# Altium PCB PTX90415AG.PcbDoc
Units mm, origin at the board's own origin, x right, y up, seen from the top; angles counter-clockwise.
Board outline 1054.6 x 677.8 mm, 2 copper layers (Top Layer, Bottom Layer); 110 components, 83 nets, 448 pads, 0 vias.
Unrouted connection lines stored in the file: 284.
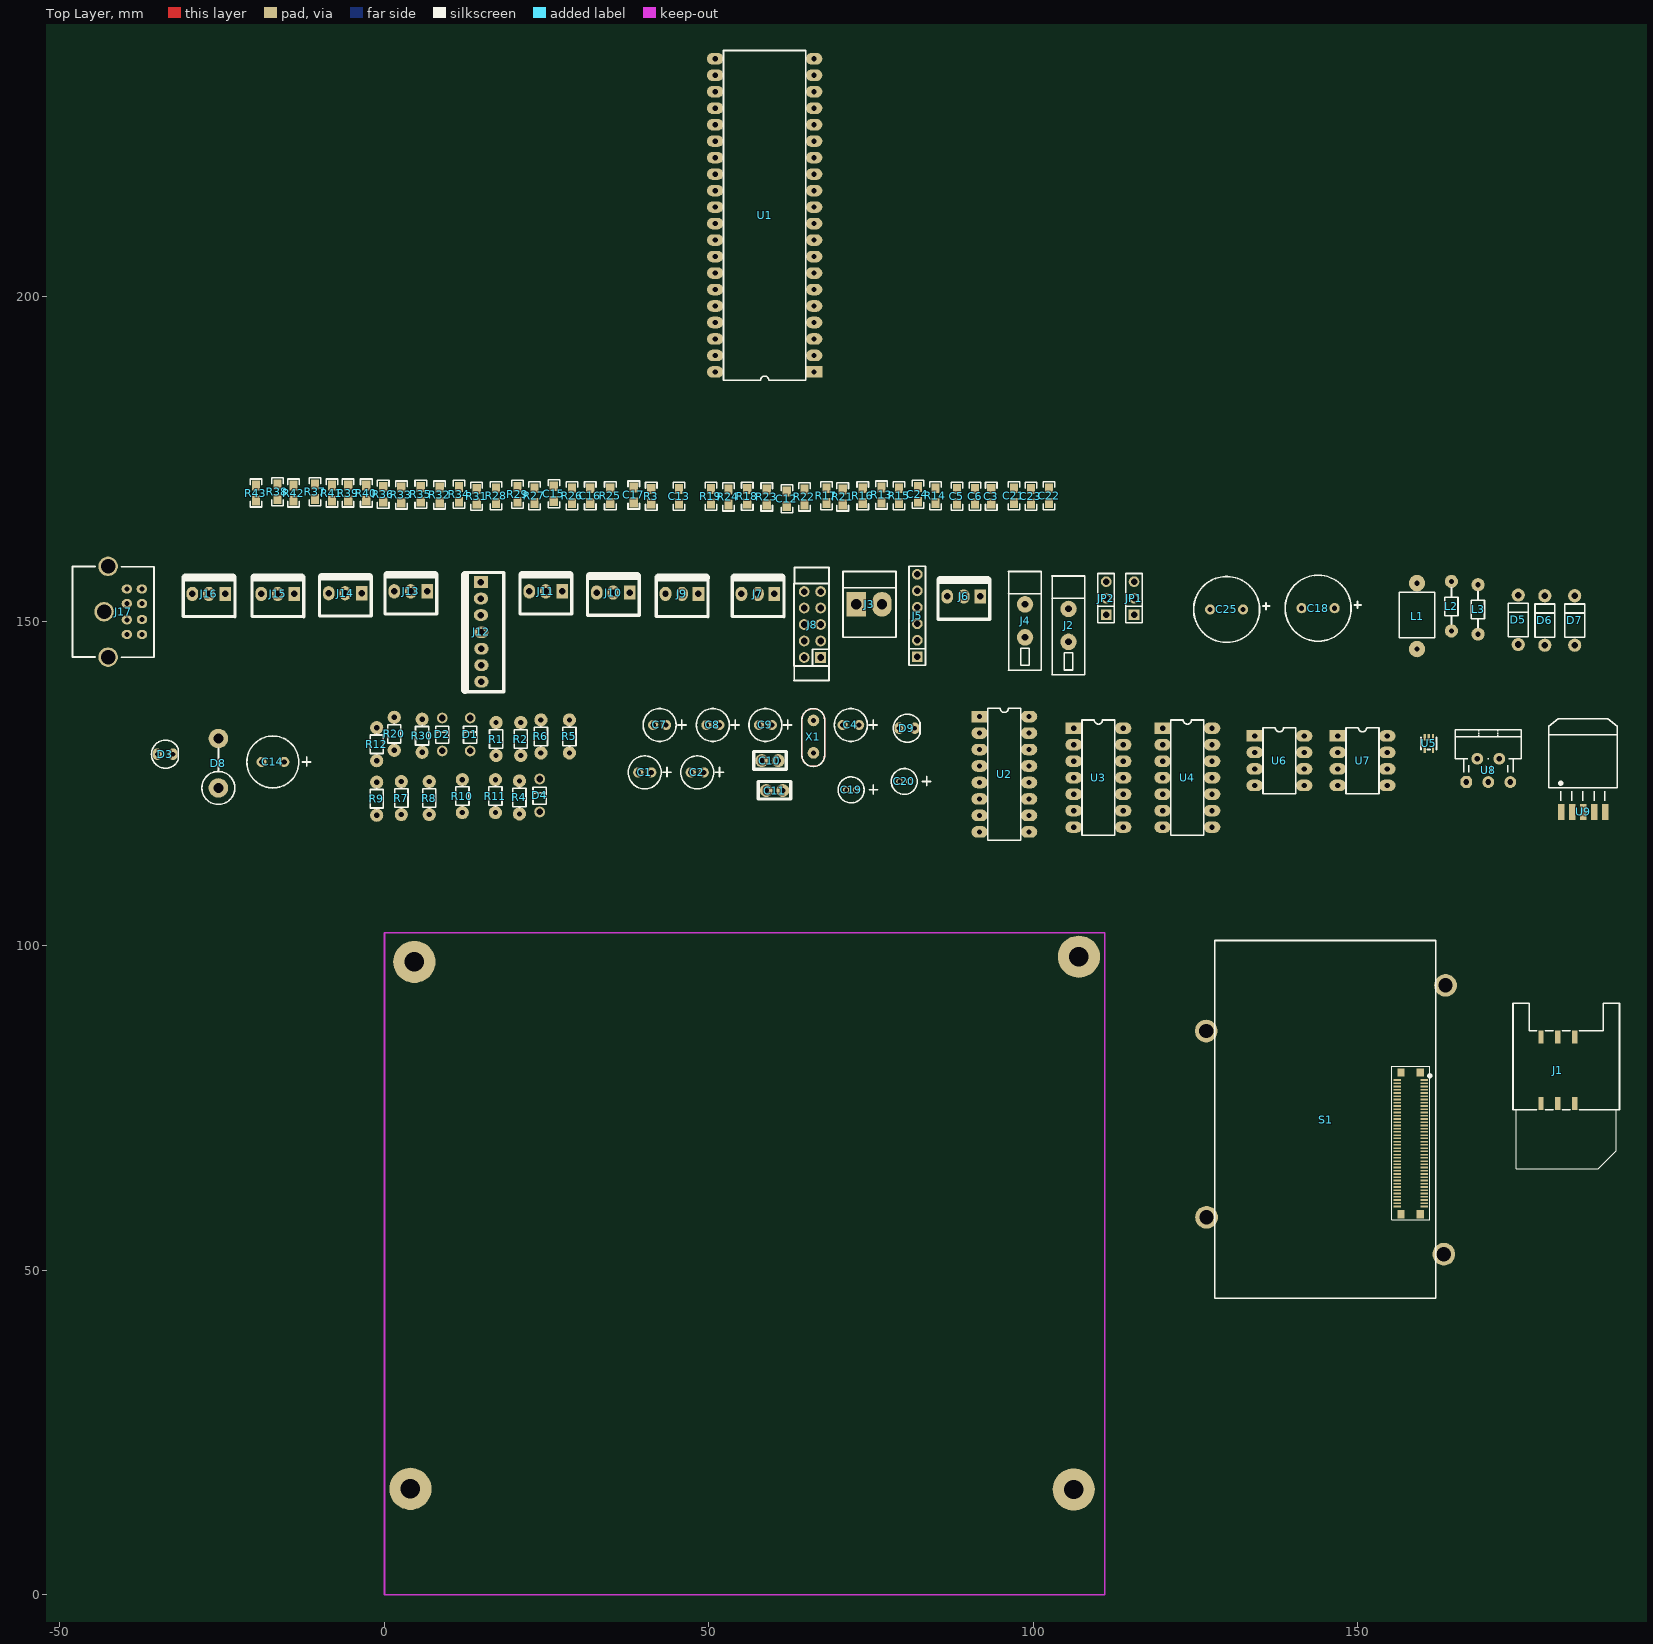
[diagram p0: Top Layer view]
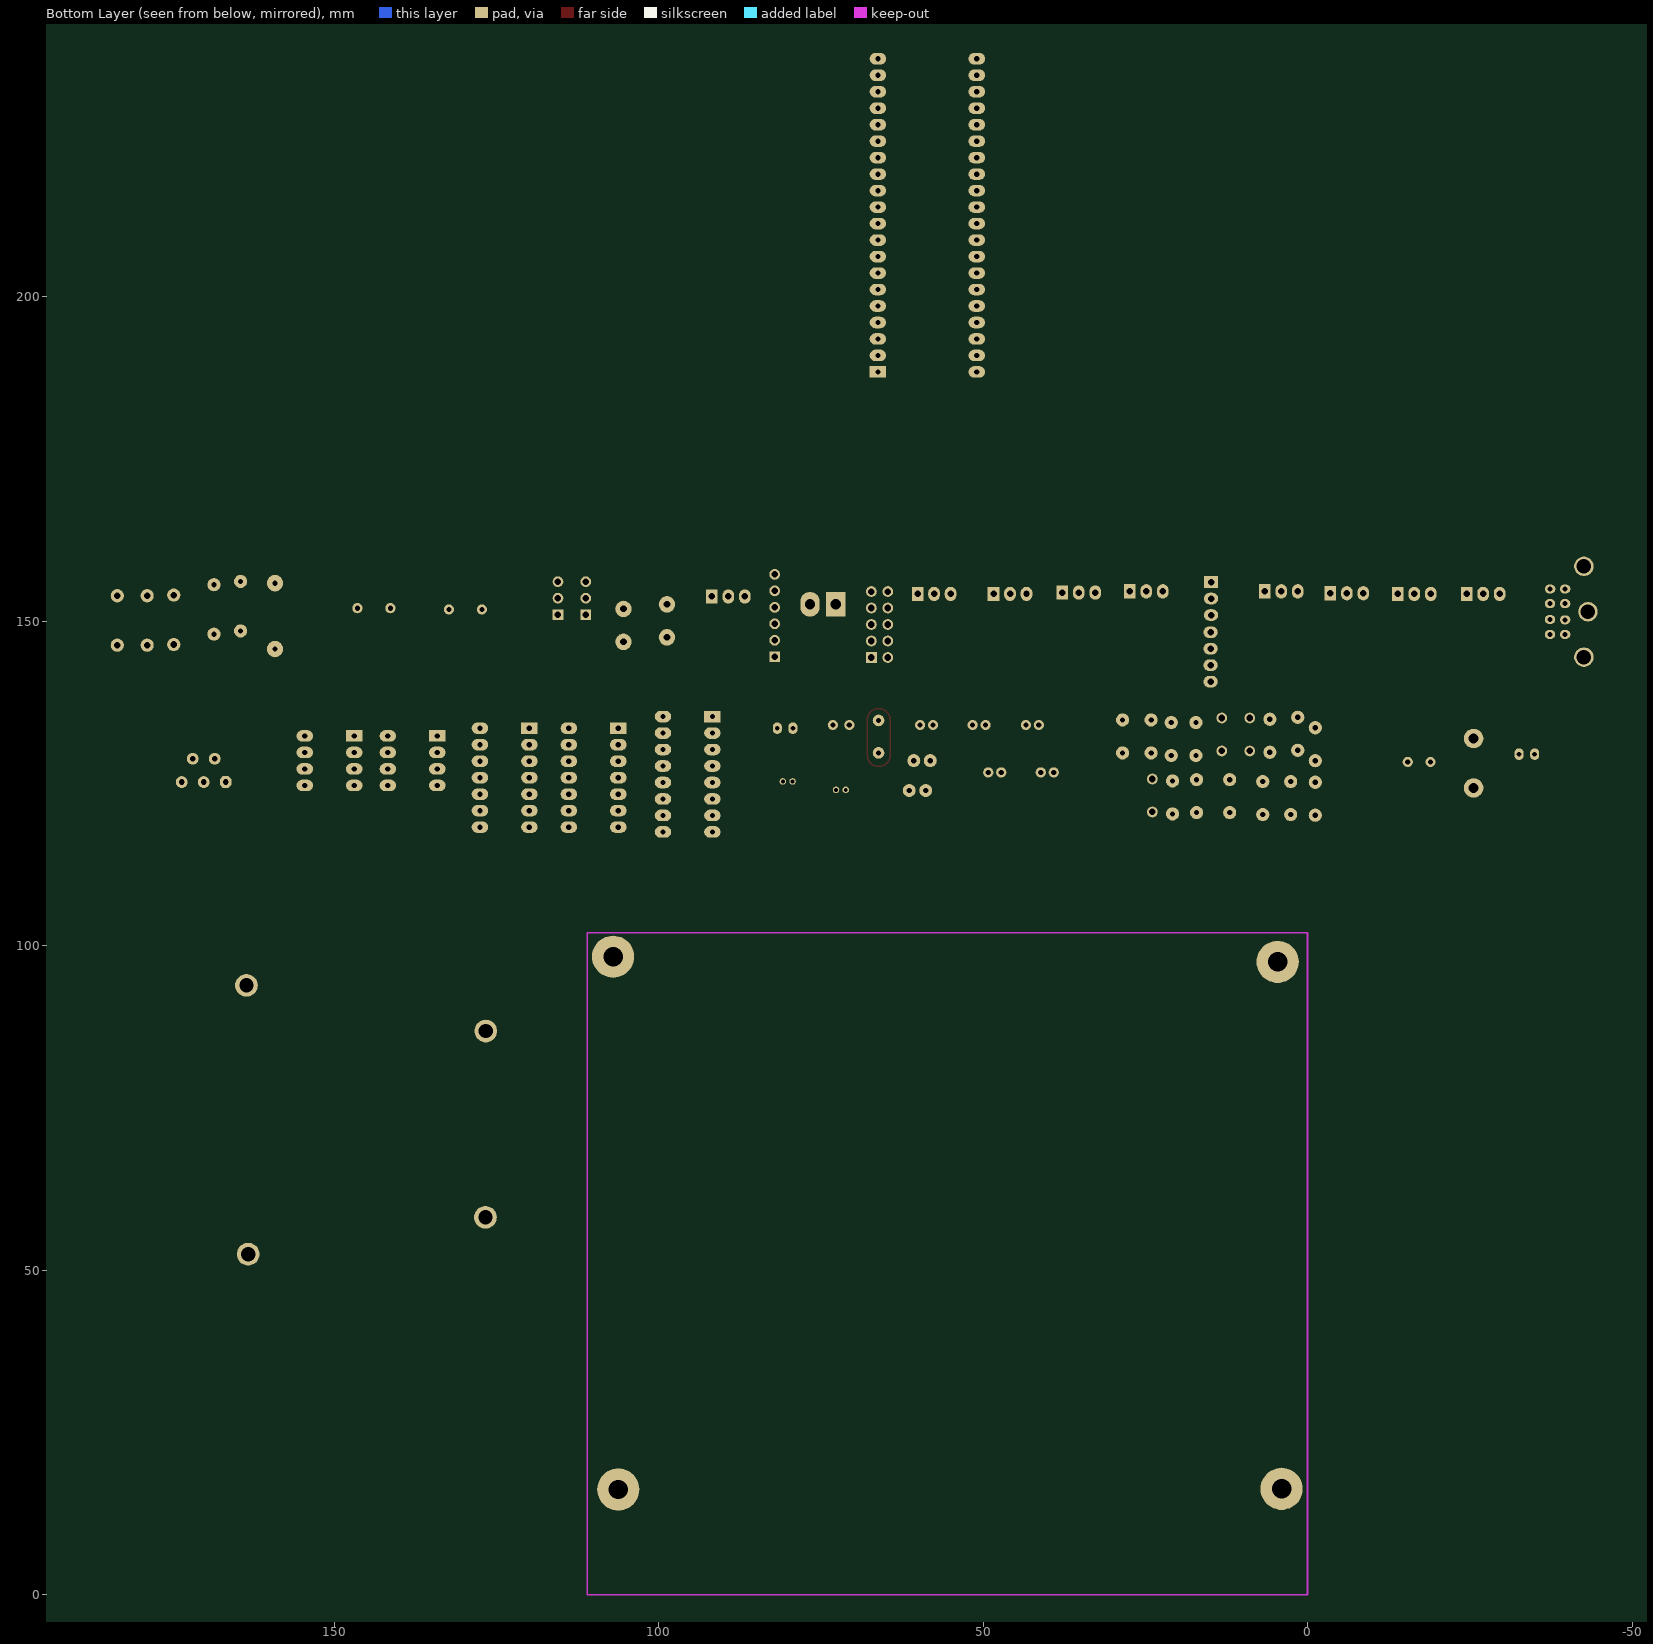
[diagram p1: Bottom Layer view, seen from below]

## Layer stack, top to bottom
Top Layer: signal copper 0.0356
Dielectric: dielectric 0.32, FR-4, Dk 4.8
Bottom Layer: signal copper 0.0356

## Board outline
-471,-338.1 -471,339.7 583.6,339.7 583.6,-338.1

## Design rules (kind name [scope] priority, off if disabled: settings)
Clearance VIAS [InNet('GND') vs (IsVia)] p1: gap=0.5
Clearance pilares [InNet('GND') vs (HasFootprint('TORNILLO 4-40'))] p2: gap=0
Clearance "Keep Out" [All vs OnLayer('Keep-Out Layer')] p3: gap=0.1
Clearance GNd [InNet('GND') vs InNet('GND')] p4: gap=0.3
Clearance [All] p5: gap=1
ComponentClearance [All] p1: gap=0.254 collisioncheckmode=3 verticalgap=0.254
PolygonConnect [All] p1: connectstyle=Relief reliefconductorwidth=0.5 reliefentries=4 polygonreliefangle="90 Angle"
RoutingVias [All] p1: holewidth=0.711 width=1.27 viastyle="Through Hole" minholewidth=0.711 minwidth=1.27 maxholewidth=0.711 maxwidth=1.27
SolderMaskExpansion [All] p1: expansion=0.102
TestPointUsage [All] p1: valid=0 allowmultiple=FALSE
Testpoint [All] p1: side=15 testpointundercomponent=TRUE minsize=1.016 maxsize=2.54 preferedsize=1.524 minholesize=0 maxholesize=1.016 preferedholesize=0.813 testpointgrid=0.025 style=1023 order=0123456789
Width [All] p1: maxlimit=2 minlimit=0.01 preferedwidth=0.2 toplayer_prefwidth=0.6 bottomlayer_prefwidth=0.5 minimp=50.000000 maximp=50.000000 favimp=50.000000
17 further rules are at their usual default settings.

## Classes and differential pairs
component class SEP00949BG: C18 C19 C20 C21 C22 C23 C24 C25 D5 D6 D7 D8 J2 J3 J4 J5 J6 J7 J8 J9 J10 J11 J12 J13 J14 J15 J16 J17 L1 L2 L3 R7 R8 R9 R10 R11 R12 R13 R14 R15 R16 R17 R18 R19 R20 R21 R22 R23 R24 R25 R26 R27 R28 R29 R30 R31 R32 R33 R34 R35 R36 R37 R38 R39 R40 R41 R42 R43 U8 U9
component class SEP00949AG: C1 C2 C3 C4 C5 C6 C7 C8 C9 C10 C11 C12 C13 C14 C15 C16 C17 D1 D2 D3 D4 J1 JP1 JP2 R1 R2 R3 R4 R5 R6 S1 U1 U2 U3 U4 U5 U6 U7 X1

## Components (designator, comment, footprint, x,y, rotation, side; value= is the part's Value field where it differs from the comment)
C1 "10uF25V" "CE 2.0/5.0" 40.098,126.699 r0 top
C2 "10uF25V" "CE 2.0/5.0" 48.198,126.699 r0 top
C3 "100nF" 0805 93.498,168.099 r90 top
C4 "1uF25V" "CE 2.5/5.0" 70.598,133.999 r0 top
C5 "100nF" 0805 88.198,168.099 r90 top
C6 "100nF" 0805 90.998,168.099 r90 top
C7 "10uF25V" "CE 2.0/5.0" 42.398,133.999 r0 top
C8 "10uF25V" "CE 2.0/5.0" 50.598,133.999 r0 top
C9 "10uF25V" "CE 2.0/5.0" 58.698,133.999 r0 top
C10 "15p" CAP2.54 59.4,128.5 r0 top
C11 "15p" CAP2.54 60.1,123.9 r0 top
C12 "100nF" 0805 62,167.7 r90 top
C13 "100nF" 0805 45.399,168.099 r90 top
C14 "100uF16V" "CE 3.5/8.0" -17.201,128.299 r0 top
C15 "100nF" 0805 26.1,168.5 r90 top
C16 "100nF" 0805 31.7,168.2 r90 top
C17 "100nF" 0805 38.4,168.3 r90 top
C18 "100uF50V" "CE 5.0/10.0" 146.398,151.999 r0 top
C19 "10uF25V" "CE 1.5/4.0" 71.9,124 r0 top
C20 "10uF25V" "CE 1.5/4.0" 80.1,125.3 r0 top
C21 "100nF" 0805 96.998,168.199 r90 top
C22 "100nF" 0805 102.398,168.199 r90 top
C23 "100nF" 0805 99.6,168.1 r90 top
C24 "100nF" 0805 82.2,168.4 r90 top
C25 "1000uF25V" "CE 5.0/10.0" 132.3,151.8 r0 top
D1 "1N4148 DO-35" DO-35_200 13.198,129.999 r90 top
D2 "1N4148 DO-35" DO-35_200 8.898,129.999 r90 top
D3 "LED VERDE" "LED 3MM" -32.6,129.5 r0 top
D4 "1N4148 DO-35" DO-35_200 23.9,120.6 r90 top
D5 "1N4007" DO-41_300 174.7,146.4 r90 top
D6 "1N4007" DO-41_300 178.798,146.299 r90 top
D7 "1N4007" DO-41_300 183.398,146.299 r90 top
D8 "1N5822" DO-201_300 -25.6,124.3 r90 top
D9 "LED AMARILLO" "LED 3MM" 81.7,133.5 r0 top
J1 "SIM CARD HOLDER" "SIM CARD HOLDER" 178.2,85.9 r0 top
J2 "WAGO236" wago236 105.4,146.8 r0 top
J3 "PW2S" PW2S 72.7,152.6 r0 top
J4 "WAGO236" wago236 98.7,147.5 r0 top
J5 "HEADER6" JUMPER_6A 82.1,144.5 r90 top
J6 "WF3S" WF3S 86.7,153.8 r0 top
J7 "WF3S" WF3S 55,154.2 r0 top
J8 "IDC10" IDC10 67.2,144.4 r90 top
J9 "WF3S" WF3S 43.3,154.2 r0 top
J10 "WF3S" WF3S 32.7,154.4 r0 top
J11 "WF3S" WF3S 22.299,154.599 r0 top
J12 "WF7S" WF7S 14.799,148.299 r90 top
J13 "WF3S" WF3S 1.499,154.599 r0 top
J14 "WF3S" WF3S -8.601,154.299 r0 top
J15 "WF3S" WF3S -19,154.2 r0 top
J16 "WF3S" WF3S -29.6,154.2 r0 top
J17 "MINI DIN 6" "MINI DIN PCB" -39.7,150.2 r90 top
JP1 "HEADER3" JUMPER_3 115.5,151 r90 top
JP2 "HEADER3" JUMPER_3 111.199,150.999 r90 top
L1 "BC14" BCC 159.098,145.699 r90 top
L2 "CCF06" AXIAL10X4_300 164.398,148.499 r90 top
L3 "CCF06" AXIAL10X4_300 168.5,148 r90 top
R1 "10K" RES_MF1/2W_200 17.198,129.299 r90 top
R2 "470" RES_MF1/2W_200 20.998,129.299 r90 top
R3 "1K2" 0805 41.099,168.099 r90 top
R4 "390" RES_MF1/2W_200 20.8,120.3 r90 top
R5 "820" RES_MF1/2W_200 28.499,129.699 r90 top
R6 "3K3" RES_MF1/2W_200 24.099,129.699 r90 top
R7 "4K7" RES_MF1/2W_200 2.598,120.199 r90 top
R8 "1K" RES_MF1/2W_200 6.898,120.199 r90 top
R9 "1K" RES_MF1/2W_200 -1.202,120.099 r90 top
R10 "1K" RES_MF1/2W_200 11.998,120.499 r90 top
R11 "470" RES_MF1/2W_200 17.098,120.499 r90 top
R12 "82K" RES_MF1/2W_200 -1.2,128.5 r90 top
R13 "5K6" 0805 76.6,168.3 r90 top
R14 "5K6" 0805 84.898,168.199 r90 top
R15 "5K6" 0805 79.298,168.199 r90 top
R16 "10K" 0805 73.698,168.199 r90 top
R17 "5K6" 0805 68.098,168.199 r90 top
R18 "10K" 0805 55.898,168.099 r90 top
R19 "5K6" 0805 50.298,168.099 r90 top
R20 "1K" RES_MF1/2W_200 1.5,130.1 r90 top
R21 "100K" 0805 70.6,168 r90 top
R22 "5K6" 0805 64.7,168 r90 top
R23 "100K" 0805 58.9,168 r90 top
R24 "5K6" 0805 53,168 r90 top
R25 "5K6" 0805 34.798,168.199 r90 top
R26 "5K6" 0805 28.898,168.199 r90 top
R27 "5K6" 0805 23.098,168.199 r90 top
R28 "5K6" 0805 17.198,168.199 r90 top
R29 "5K6" 0805 20.5,168.4 r90 top
R30 "390" RES_MF1/2W_200 5.8,129.8 r90 top
R31 "5K6" 0805 14.2,168.1 r90 top
R32 "5K6" 0805 8.499,168.299 r90 top
R33 "5K6" 0805 2.599,168.299 r90 top
R34 "5K6" 0805 11.499,168.399 r90 top
R35 "5K6" 0805 5.599,168.399 r90 top
R36 "150K" 0805 -0.201,168.399 r90 top
R37 "150K" 0805 -10.701,168.799 r90 top
R38 "150K" 0805 -16.501,168.799 r90 top
R39 "150K" 0805 -5.6,168.6 r90 top
R40 "150K" 0805 -2.801,168.599 r90 top
R41 "150K" 0805 -8.101,168.599 r90 top
R42 "150K" 0805 -14.001,168.599 r90 top
R43 "150K" 0805 -19.801,168.599 r90 top
S1 "SIM548" SIM548 160.2,79.3 r0 top
U1 "18F4620" DIP40 66.2,188.4 r180 top
U2 "MAX232 DIP-16" DIP16 91.698,135.299 r0 top
U3 "74HC32" DIP14 106.2,133.5 r0 top
U4 "74HC32" DIP14 119.9,133.5 r0 top
U5 "ESDA6V1W5" SOT-323-5L 160.3,129.8 r0 top
U6 "24LC256" DIP8 137.9,128.5 r0 top
U7 "24LC256" DIP8 150.7,128.5 r0 top
U8 "LM2576T-ADJ" TO-220-5V 166.7,125.2 r0 top
U9 "MIC29302WU" TO-220-5S 181.3,120.6 r0 top
X1 "20MHz" UM5 66.098,129.699 r90 top

## Footprints (in the part's own frame and the unit in brackets; to place one, negate y for a bottom-side part, rotate by r counter-clockwise, add the part's x,y. Pads: shape width x height; smd on the part's side, far side on the other; paste and mask are expansions set on the pad)
0805 [mil]
  rect 60x50 smd: 1(0,0) 2(90,0)
  silkscreen extent -40,-35 130,35
AXIAL10X4_300 [mil]
  round 80 hole 32: 1(0,0) 2(300,0)
  silkscreen extent 41,-40 259,40
BCC [mil]
  round 100 hole 32: 1(0,0) 2(400,0)
  silkscreen extent 69,-108 344,108
CAP2.54 [mm] "CAPACITOR AXIAL 2.54"
  round 2 hole 0.8: 1(-1.27,0) 2(1.27,0)
  silkscreen extent -2.5,-1.3 2.5,1.4
"CE 1.5/4.0" [mm]
  round 1 hole 0.6: 1(0.75,0) 2(-0.75,0)
  silkscreen extent -2,-2 4.06,2
"CE 2.0/5.0" [mm]
  round 1.575 hole 0.8: 1(1,0) 2(-1,0)
  silkscreen extent -2.54,-2.54 4.06,2.54
"CE 2.5/5.0" [mil]
  round 62 hole 31.5: 1(100,0) 2(0,0)
  silkscreen extent -50,-100 210,100
"CE 3.5/8.0" [mm]
  round 1.575 hole 0.8: 1(1.75,0) 2(-1.75,0)
  silkscreen extent -4,-4 5.84,4
"CE 5.0/10.0" [mil]
  round 62 hole 31.5: 1(0,0) 2(-200,0)
  silkscreen extent -300,-200 160,200
DIP8 [mil]
  rect 100x70 hole 32: 1(-150,150)
  oval 100x70 hole 32: 2(-150,50) 3(-150,-50) 4(-150,-150) 5(150,-150) 6(150,-50) 7(150,50) 8(150,150)
  silkscreen extent -100,-200 100,200
DIP14 [mil]
  rect 100x70 hole 32: 1(0,0)
  oval 100x70 hole 32: 2(0,-100) 3(0,-200) 4(0,-300) 5(0,-400) 6(0,-500) 7(0,-600) 8(300,-600) 9(300,-500) 10(300,-400) 11(300,-300) 12(300,-200) 13(300,-100) 14(300,0)
  silkscreen extent 50,-650 250,50
DIP16 [mil]
  rect 100x70 hole 32: 1(0,0)
  oval 100x70 hole 32: 2(0,-100) 3(0,-200) 4(0,-300) 5(0,-400) 6(0,-500) 7(0,-600) 8(0,-700) 9(300,-700) 10(300,-600) 11(300,-500) 12(300,-400) 13(300,-300) 14(300,-200) 15(300,-100) 16(300,0)
  silkscreen extent 50,-750 250,50
DIP40 [mil]
  rect 100x70 hole 32: 1(0,0)
  oval 100x70 hole 32: 2(0,-100) 3(0,-200) 4(0,-300) 5(0,-400) 6(0,-500) 7(0,-600) 8(0,-700) 9(0,-800) 10(0,-900) 11(0,-1000) 12(0,-1100) 13(0,-1200) 14(0,-1300) 15(0,-1400) 16(0,-1500) 17(0,-1600) 18(0,-1700) 19(0,-1800) 20(0,-1900) 21(600,-1900) 22(600,-1800) 23(600,-1700) 24(600,-1600) 25(600,-1500) 26(600,-1400) 27(600,-1300) 28(600,-1200) 29(600,-1100) 30(600,-1000) 31(600,-900) 32(600,-800) 33(600,-700) 34(600,-600) 35(600,-500) 36(600,-400) 37(600,-300) 38(600,-200) 39(600,-100) 40(600,0)
  silkscreen extent 50,-1950 550,50
DO-35_200 [mil]
  round 65 hole 40: A(0,0) K(200,0)
  silkscreen extent 48,-40 150,40
DO-41_300 [mil]
  round 80 hole 40: A(0,0) K(300,0)
  silkscreen extent 47,-60 250,60
DO-201_300 [mm]
  round 3 hole 1.524: A(0,0) K(7.62,0)
  silkscreen extent -2.54,-2.54 6.1,2.54
IDC10 [mil]
  rect 65x65 hole 40: 1(0,0)
  round 65 hole 40: 2(0,100) 3(100,0) 4(100,100) 5(200,0) 6(200,100) 7(300,0) 8(300,100) 9(400,0) 10(400,100)
  silkscreen extent -140,-51 545,161
JUMPER_3 [mil]
  rect 65x65 hole 40: 1(0,0)
  round 65 hole 40: 2(100,0) 3(200,0)
  silkscreen extent -50,-50 250,50
JUMPER_6A [mil]
  rect 65x65 hole 40: 1(0,0)
  round 65 hole 40: 2(100,0) 3(200,0) 4(300,0) 5(400,0) 6(500,0)
  silkscreen extent -50,-50 550,50
"LED 3MM" [mm]
  oval 1.4x1.8 hole 0.75: A(-2.4,0) K(0,0)
  silkscreen extent -3.3,-2.16 0.82,2.16
"MINI DIN PCB" [mm] "CONECTOR MINI DIN 6 A 90 GRADOS PARA PCB"
  oval 1.4x1.6 hole 0.75: 1(0,0) 2(2.5,0) 3(-2.25,0) 4(4.75,0) 5(-2.25,-2.337) 6(4.75,-2.311) 7(0.05,-2.337) 8(2.5,-2.337)
  round 3 hole 2.25: 9(-5.75,2.886) 9(1.25,3.505) 9(8.25,2.886)
  silkscreen extent -5.76,-4.19 8.22,8.37
PW2S [mm]
  rect 3x3.8 hole 1.6: 1(0,0)
  oval 3x3.8 hole 1.6: 2(3.962,0)
  silkscreen extent -2.03,-5.08 6.11,5.08
RES_MF1/2W_200 [mil]
  round 80 hole 32: 1(0,0) 2(200,0)
  silkscreen extent 38,-40 162,40
SIM548 [mm] "SIM548"
  round 3.5 hole 2.2: 0(-33.579,7.544) 0(-33.528,-21.158) 0(3.023,-26.848) 0(3.302,14.58)
  rect 1.115x1.3 smd: 0(-3.556,-20.668) 0(-3.556,1.15) 0(-0.61,1.15) 0(-0.584,-20.668)
  rect 1.2x0.26 smd: 1(0,0) 2(-4.15,0) 3(0,-0.5) 4(-4.15,-0.5) 5(0,-1) 6(-4.15,-1) 7(0,-1.5) 8(-4.15,-1.5) 9(0,-2) 10(-4.15,-2) 11(0,-2.5) 12(-4.15,-2.5) 13(0,-3) 14(-4.15,-3) 15(0,-3.5) 16(-4.15,-3.5) 17(0,-4) 18(-4.15,-4) 19(0,-4.5) 20(-4.15,-4.5) 21(0,-5) 22(-4.15,-5) 23(0,-5.5) 24(-4.15,-5.5) 25(0,-6) 26(-4.15,-6) 27(0,-6.5) 28(-4.15,-6.5) 29(0,-7) 30(-4.15,-7) 31(0,-7.5) 32(-4.15,-7.5) 33(0,-8) 34(-4.15,-8) 35(0,-8.5) 36(-4.15,-8.5) 37(0,-9) 38(-4.15,-9) 39(0,-9.5) 40(-4.15,-9.5) 41(0,-10) 42(-4.15,-10) 43(0,-10.5) 44(-4.15,-10.5) 45(0,-11) 46(-4.15,-11) 47(0,-11.5) 48(-4.15,-11.5) 49(0,-12) 50(-4.15,-12) 51(0,-12.5) 52(-4.15,-12.5) 53(0,-13) 54(-4.15,-13) 55(0,-13.5) 56(-4.15,-13.5) 57(0,-14) 58(-4.15,-14) 59(0,-14.5) 60(-4.15,-14.5) 61(0,-15) 62(-4.15,-15) 63(0,-15.5) 64(-4.15,-15.5) 65(0,-16) 66(-4.15,-16) 67(0,-16.5) 68(-4.15,-16.5) 69(0,-17) 70(-4.15,-17) 71(0,-17.5) 72(-4.15,-17.5) 73(0,-18) 74(-4.15,-18) 75(0,-18.5) 76(-4.15,-18.5) 77(0,-19) 78(-4.15,-19) 79(0,-19.5) 80(-4.15,-19.5)
  silkscreen extent -32.28,-33.66 1.78,21.49
"SIM CARD HOLDER" [mm] "SIM CARD HOLDER"
  rect 0.8x2 smd: 1(0,0) 2(2.6,0) 3(5.2,0) 4(0,-10.2) 5(2.6,-10.2) 6(5.2,-10.2)
  silkscreen extent -4.3,-20.3 12.1,5.2
SOT-323-5L [mm]
  rect 0.35x1 smd: 1(-0.025,0.4) 2(1.275,0.4) 3(0.625,2.3) 4(-0.025,2.3) 5(1.275,2.3)
  silkscreen extent -0.6,0.4 1.8,2.3
TO-220-5S [mm]
  rect 1x2.5 smd: 1(0,0) 2(1.693,0) 3(3.387,0) 4(5.08,0) 5(6.773,0)
  silkscreen extent -1.91,1.72 8.68,14.35
TO-220-5V [mil]
  oct 71.67x71.67 hole 35: 1(0,0)
  round 71.67 hole 35: 2(66.67,141.67) 3(133.33,0) 4(200,141.67) 5(266.67,0)
  silkscreen extent -67,59 333,317
UM5 [mm] "UM-5"
  round 1.8 hole 0.762: 1(0,0) 2(5,0)
  Top Layer lines w0.254: 5.08,-1.722 -0.347,-1.722 cw(c-0.347,0.028) -0.381,1.778 5.08,1.778 cw(c5.08,0.028) 5.114,-1.722
  silkscreen extent -2.1,-1.72 6.83,1.78
wago236 [mil]
  round 100 hole 40: 1(0,0) 2(0,200)
  silkscreen extent -100,-200 99,400
WF3S [mm]
  rect 1.8x2.2 hole 1: 1(5.08,0)
  oval 1.8x2.2 hole 1: 2(2.54,0) 3(0,0)
  silkscreen extent -1.42,-3.51 6.55,2.54
WF7S [mm]
  rect 1.8x2.2 hole 1: 1(7.72,-0.065)
  oval 1.8x2.2 hole 1: 2(5.18,-0.065) 3(2.64,-0.065) 4(0,-0.127) 5(-2.54,-0.127) 6(-5.08,-0.127) 7(-7.62,-0.127)
  silkscreen extent -9.2,-3.6 9.2,2.41

## Part data
C1 C2 C7 C8 C9: library part "10uF25V 5X11X2", "CAPACITOR ELECTROLITICO RADIAL 5X11mm PASO 2mm 85ªC +/-20 25V 10uF"
C3 C5 C6 C12 C13 C15 C16 C17 C21 C22 C23 C24: library part 100n, "CAPACITOR SMD 0805 X7R  50 V 100 nF"
C4: "CAP ELECT RAD 1.0UF 25V 5X11MM PASO 2MM 85ºC"
C10 C11: "CAPACITOR CERAMICO DISCO 2.54 mm  X7R  50V  15pF"
C14: "CAP ELECT RADIAL 100UF 16V 6.3X12MM PASO 2.5MM 85ºC 20%"
C18: "CAPACITOR ELECTROLITICO RADIAL 10 X12 mm PASO 5 mm 50 V 100 uF"
C19 C20: library part "10uF25V 4X7X1.5", "CAPACITOR ELECTROLITICO RADIAL 5X7mm PASO 1.5mm 85ªC +/-20 25V 10uF"
C25: "CAP ELECT RAD 1000UF 25V 10X20MM PASO 5MM 85ºC 20%"
D1 D2 D4: "1N4148 DO-35 DIODO"
D3: library part "LED VERDE 3MM", "LED VERDE 3MM"
D5 D6 D7: library part "1N4007 DO-41", "1N4007 DO-41 DIODO"
D8: library part "1N5822 DO-201", "1N5822 DO-201 DIODO"
D9: library part "LED AMARILLO 3MM", "LED AMARILLO 3MM"
J1: "ZOCALO PARA TARJETA DE MEMORIA SIM"
J2 J4: library part "WAGO 236", "WAGO 236-401 BORNE GRIS CLARO"
J3: "PW2S HEADER .156\" RECTO 2 VIAS"
J5: "TIRA MOLEX 1X6 11MM MACHO RECTA PARA PCB"
J6 J7 J9 J10 J11 J13 J14 J15 J16: "WF3S HEADER .100\" RECTO 3 VIAS"
J8: "CONECTOR IDC HEMBRA PCB NO POLARIZADO PASO 2.54 mm RECTO 2X5 VIAS"
J12: "WF7S HEADER .100\" RECTO 7 VIAS"
J17: library part "CONECTOR MINI DIN 6", "CONECTOR MINI DIN 6 PARA PCB"
JP1 JP2: "TIRA MOLEX 1X40 11MM MACHO RECTA PARA PCB"
L1: "INDUCTOR BC14"
L2 L3: "INDUCTOR CCF06"
R1: "RESISTOR METAL FILM 0.5 W 5% 10 KILOHMS"
R2 R11: "RESISTOR METAL FILM 0.5 W 5% 470 OHMS"
R3: "RESISTOR SMD0805 0.125 W 5%  1.2 K OHMS"
R4 R30: "RESISTOR METAL FILM 0.5 W 5% 390 OHMS"
R5: "RESISTOR METAL FILM 0.5 W 5% 820 OHMS"
R6: "RESISTOR METAL FILM 0.5 W 5% 3.3 KILOHMS"
R7: "RESISTOR METAL FILM 0.5 W 5% 4.7 KILOHMS"
R8 R10 R20: "RESISTOR METAL FILM 0.5 W 5% 1 K OHMS"
R9: library part 10K, "RESISTOR SMD0805 0.125 W 5%  10 K OHMS"
R12: "RESISTOR METAL FILM 0.5 W 5% 82 KILOHMS"
R13 R14 R15 R17 R19 R22 R24 R25 R26 R27 R28 R29 R31 R32 R33 R34 R35: "RESISTOR SMD0805 0.125 W 5%  5.6 K OHMS"
R16 R18: "RESISTOR SMD0805 0.125 W 5%  10 K OHMS"
R21 R23: "RESISTOR SMD0805 0.125 W 5%  100 K OHMS"
R36 R37 R38 R39 R40 R41 R42 R43: "RESISTOR SMD0805 0.125 W 5%  150 K OHMS"
S1: library part "SIM548 QUAD-BAND GSM/GPRS GPS", "SIM340C QUAD-BAND GSM/GPRS GSM850MHz/EGSM900MHz/DCS18000MHz/PCS1900MHz GPS"
U1: library part "18F4620 P/I", "PIC Microchip"
U2: "MAX232 DIP-16 CIRCUITO INTEGRADO"
U3 U4: library part "74HC08 DIP", "74HC08 DIP-14 QUAD 2-INPUT AND GATE"
U5: "ESDA6V1W5 ARRAY  FOR ESD PROTECTION"
U6 U7: "256K I2C CMOS Serial EEPROM"
U8: "LM2576T-ADJ TO-220-5 CIRC INT"
U9: "MIC29302WU TO-220 (T) HIGH CURRENT LOW DROPOUT REGULATORS"
X1: library part CRYSTAL, "20.000 MHZ XL20M-UM5 10PPM CRISTAL"

## Free pads (board coordinates)
  round 6.5 hole 3: 0(4,16.3) 0(4.6,97.5) 0(106.2,16.2) 0(107,98.3)

## Nets (pads, with @x,y where several pads share a name; then routed paths per layer and width w, separated by ;. In a path a pad name is that pad's centre, name@x,y a point inside that pad or via, vN(x,y) a via of type N, cw(c..) or ccw(c..) an arc to the next point about the centre after c; other vN are vias at no path point)
+5V: C8.1 C12.1 C15.1 C16.2 C17.2 C20.1 C24.2 D6.A J6.3 J7.3 J8.2 J9.3 J10.3 J11.3 J12.2 J13.3 J14.3 J16.3 J17.4 L3.2 R1.1 R8.2 R12.2 R14.2 R16.2 R18.2 R21.2 R23.2 R25.2 R27.2 U2.16 U3.14 U4.14 U6.8 U7.1 U7.8 U9.4
+7V: C21.2 D5.K J3.2 L2.1
AD4: J8.7 R32.1 U1.37
AD5: J8.6 R31.1 U1.38
AD6: J5.5 J8.5 R29.1 U1.39
AD7: J5.4 J8.4 R28.1 U1.40
AUX_1: J12.3 R26.1 U1.24
AUX_2: J12.4 R24.1 U1.16
AUX_3: J12.5 R22.1 U1.21
AUX_4: J12.6 R19.1 U1.17
AUX_5: J12.7 R17.1 U1.19
CTS: S1.47 U1.29
DCD: S1.37 U1.6
E: J8.8 R33.1 U1.36
ENCENDIDO: R3.2 R15.1 U1.22
ESTADO: R30.2 U1.30
GND: C3.1 C4.2 C5.2 C6.1 C7.1 C8.2 C9.2 C10.1 C11.1 C12.2 C13.1 C14.2 C15.2 C16.1 C17.1 C18.2 C19.2 C20.2 C21.1 C22.1 C23.1 C24.1 C25.2 D3.K D8.A D9.K J1.4 J3.1 J4.1 J5.3 J6.1 J7.1 J8.1 J9.1 J10.1 J11.1 J12.1 J13.1 J14.1 J15.1 J16.1 J17.3 pad.0 R6.1 R9.1 R10.1 R11.1 R13.2 R15.2 R17.2 R19.2 R20.1 R22.2 R24.2 R26.2 R28.2 R29.2 R31.2 R32.2 R33.2 R34.2 R35.2 R36.2 R37.2 R38.2 R39.2 R40.2 R41.2 R42.2 R43.2 S1.2 S1.4 S1.6 S1.8 S1.10 S1.33 S1.39 U1.12 U1.31 U2.15 U3.7 U4.7 U5.3 U6.1 U6.2 U6.3 U6.4 U7.2 U7.3 U7.4 U8.3 U8.5 U9.3
GPS: U1.28 U3.5 U3.10
I2C_SCL: R16.1 U1.18 U6.6 U7.6
I2C_SDA: R18.1 U1.23 U6.5 U7.5
MCLR: J5.1 R2.2 U1.1
MODEM: U1.27 U3.2 U3.13
NET_STATE: R13.1 S1.16 U1.34
NetC1_1: C1.1 U2.4
NetC1_2: C1.2 U2.5
NetC2_1: C2.1 U2.1
NetC2_2: C2.2 U2.3
NetC3_2: C3.2 R1.2 R2.1
NetC7_2: C7.2 U2.6
NetC9_1: C9.1 U2.2
NetC10_2: C10.2 U1.13 X1.2
NetC11_2: C11.2 U1.14 X1.1
NetC18_1: C18.1 J2.1 U8.1
NetC19_1: C19.1 C22.2 C23.2 L2.2 U9.1 U9.2
NetC25_1: C25.1 D5.A L1.2 R7.2
NetD1_K: D1.K U3.11
NetD2_K: D2.K U3.8
NetD3_A: D3.A R4.1
NetD4_K: D4.K U4.11
NetD6_K: D6.K D7.A
NetD8_K: D8.K L1.1 U8.2
NetD9_A: D9.A R30.1
NetJ8_10: J8.10 R12.1 R20.2
NetJP1_1: JP1.1 S1.68
NetJP1_3: JP1.3 S1.72
NetJP2_1: JP2.1 S1.70
NetJP2_3: JP2.3 S1.74
NetR3_1: R3.1 S1.17
NetR4_2: R4.2 S1.19
NetR5_2: R5.2 R6.2 S1.41
NetR7_1: R7.1 R10.2 U8.4
NetR8_1: R8.1 R11.2 U9.5
PS2_CL: J17.5 R27.1 U1.33
PS2_DA: J17.1 R25.1 U1.20
RS: J8.9 R34.1 U1.35
RS_AUX: U1.15 U4.2 U4.13
RX_RS232_AUX: J15.3 U2.14
RX_RS232_GPS: JP2.2 U2.7
RXD: D1.A D2.A D4.A R21.1 U1.26
RXD_AUX: U2.11 U4.3
RXD_GPS: U2.10 U3.6
RXD_MODEM: R5.1 U3.3
SENSOR_0: J6.2 R36.1 U1.2
SENSOR_1: J7.2 R37.1 U1.3
SENSOR_2: J9.2 R38.1 U1.4
SENSOR_3: J10.2 R39.1 U1.5
SENSOR_4: J11.2 R40.1 U1.7
SENSOR_5: J13.2 R41.1 U1.8
SENSOR_6: J14.2 R42.1 U1.9
SENSOR_7: J16.2 R43.1 U1.10
SIM_CLOCK: J1.3 S1.31 U5.4
SIM_DATA: J1.6 S1.29 U5.1
SIM_RESET: J1.2 S1.27 U5.2
SIM_VDD: J1.1 S1.25 U5.5
TMR1: R14.1 R35.1
TX_RS232_AUX: J15.2 U2.13
TX_RS232_GPS: JP1.2 U2.8
TXD: R23.1 U1.25 U3.1 U3.4 U4.1
TXD_AUX: U2.12 U4.12
TXD_GPS: U2.9 U3.9
TXD_MODEM: S1.43 U3.12
VBAT: C13.2 C14.1 D7.K R9.2 S1.1 S1.3 S1.5 S1.7 S1.9
VDD: C4.1 C5.1 C6.2 J5.2 L3.1 U1.11 U1.32
pads on no net: J1.5 J2.2 J4.2 J5.6 J8.3 J17.2 J17.6 J17.7 J17.8 J17.9 S1.0 S1.11 S1.12 S1.13 S1.14 S1.15 S1.18 S1.20 S1.21 S1.22 S1.23 S1.24 S1.26 S1.28 S1.30 S1.32 S1.34 S1.35 S1.36 S1.38 S1.40 S1.42 S1.44 S1.45 S1.46 S1.48 S1.49 S1.50 S1.51 S1.52 S1.53 S1.54 S1.55 S1.56 S1.57 S1.58 S1.59 S1.60 S1.61 S1.62 S1.63 S1.64 S1.65 S1.66 S1.67 S1.69 S1.71 S1.73 S1.75 S1.76 S1.77 S1.78 S1.79 S1.80 U4.4 U4.5 U4.6 U4.8 U4.9 U4.10 U6.7 U7.7

## Keep-outs
Keep-Out Layer:
  lines w0.254: 0,0 111,0 111,102 0,102 0,0

## Silkscreen, mask and mechanical layers (free items; w line width, h text height)
Top Solder:
  rectangle: 53,79 67.9,91
  rectangle: 29.5,49.9 41.4,66.8
Bottom Solder:
  rectangle: 56.8,79.8 67.1,90.4